# Altium PCB PCB-00001-A-01.PcbDoc (part 1 of 3)
Units mm, origin at the board's own origin, x right, y up, seen from the top; angles counter-clockwise.
Board outline 139.7 x 78.23 mm, 4 copper layers (Top Layer, GND, PWR, Bottom Layer), stack 1.58 mm thick; 84 components, 52 nets, 278 pads, 148 vias.
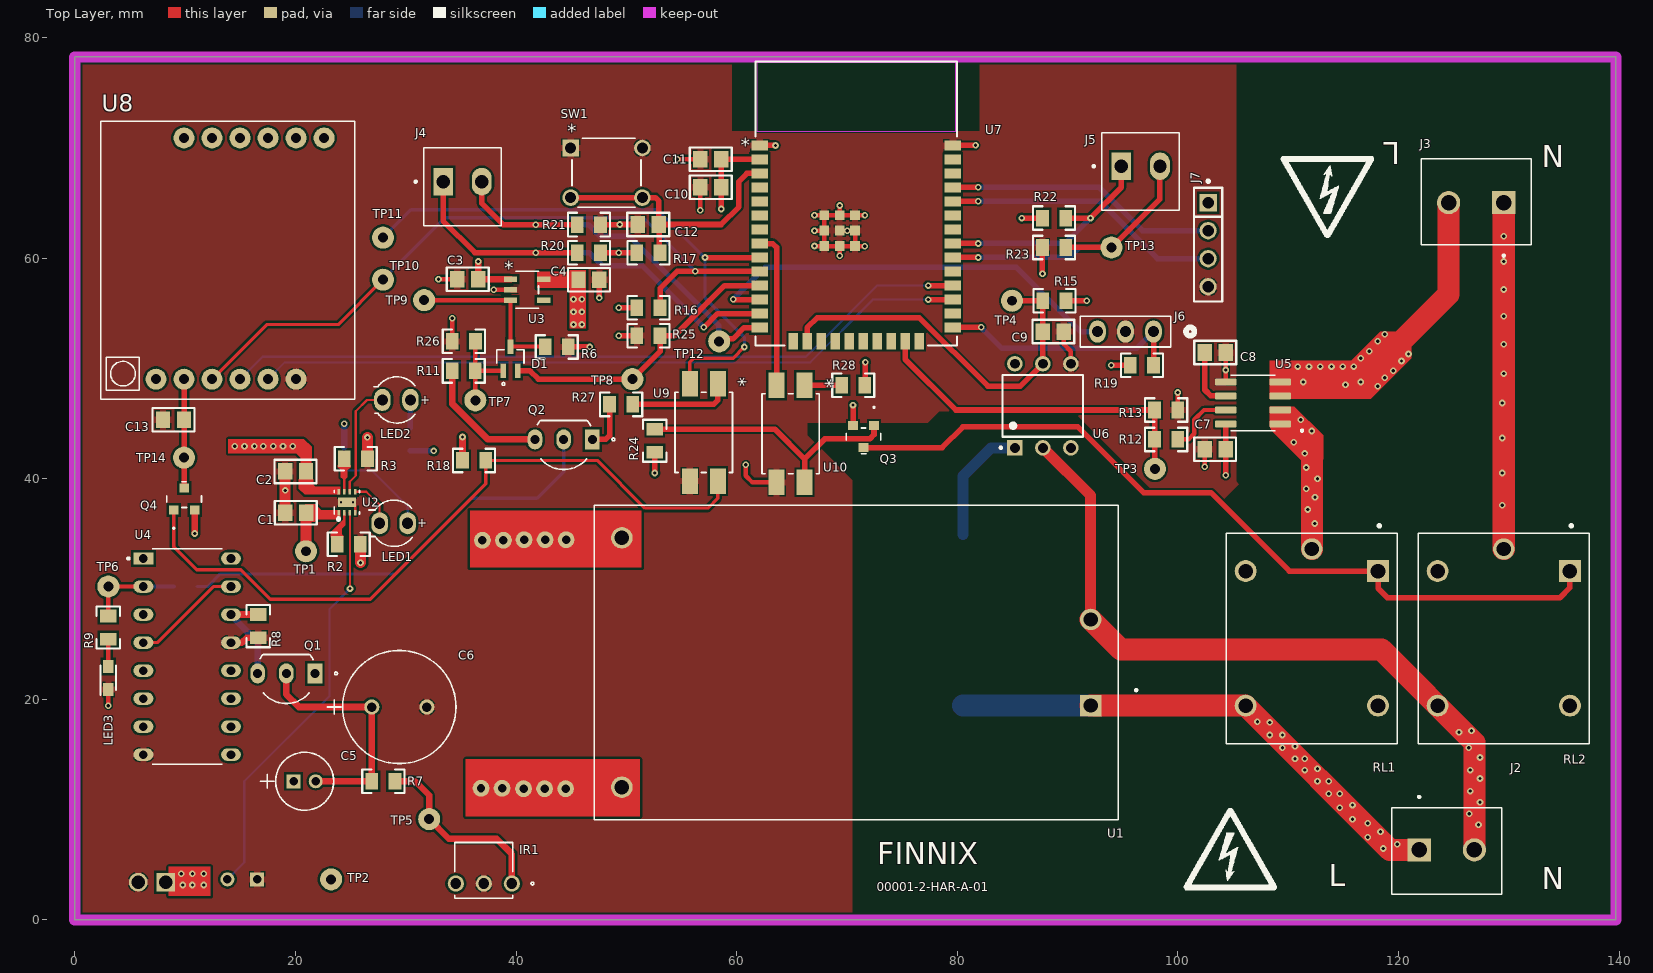
[diagram p0: Top Layer view]
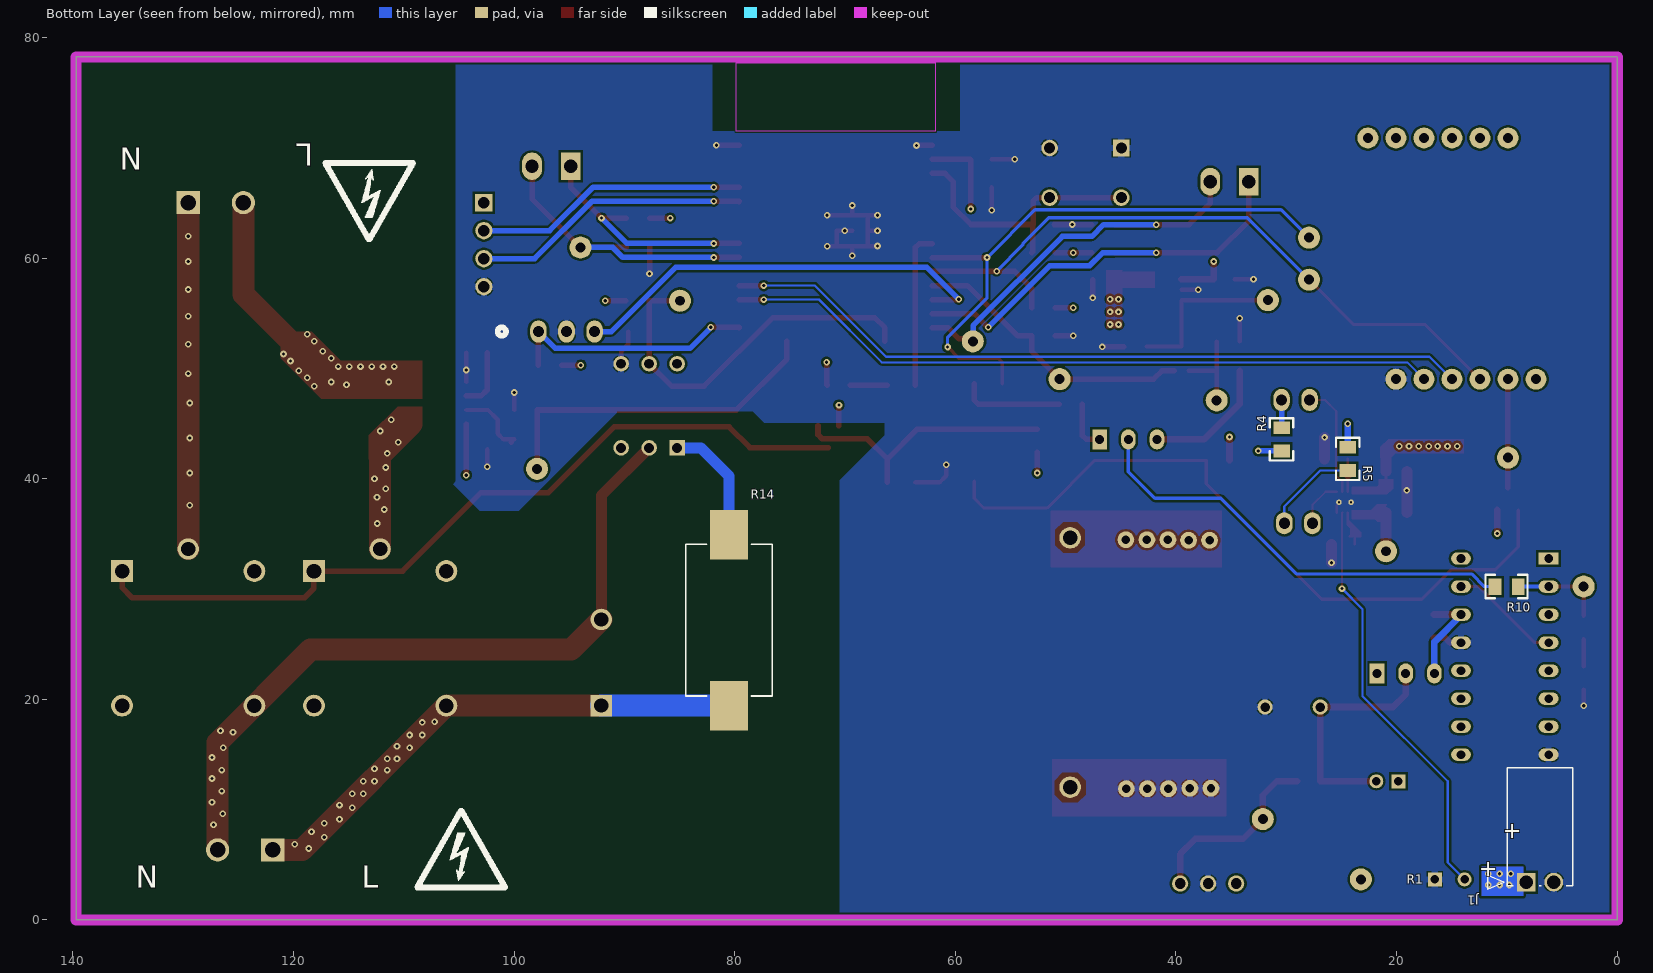
[diagram p1: Bottom Layer view, seen from below]
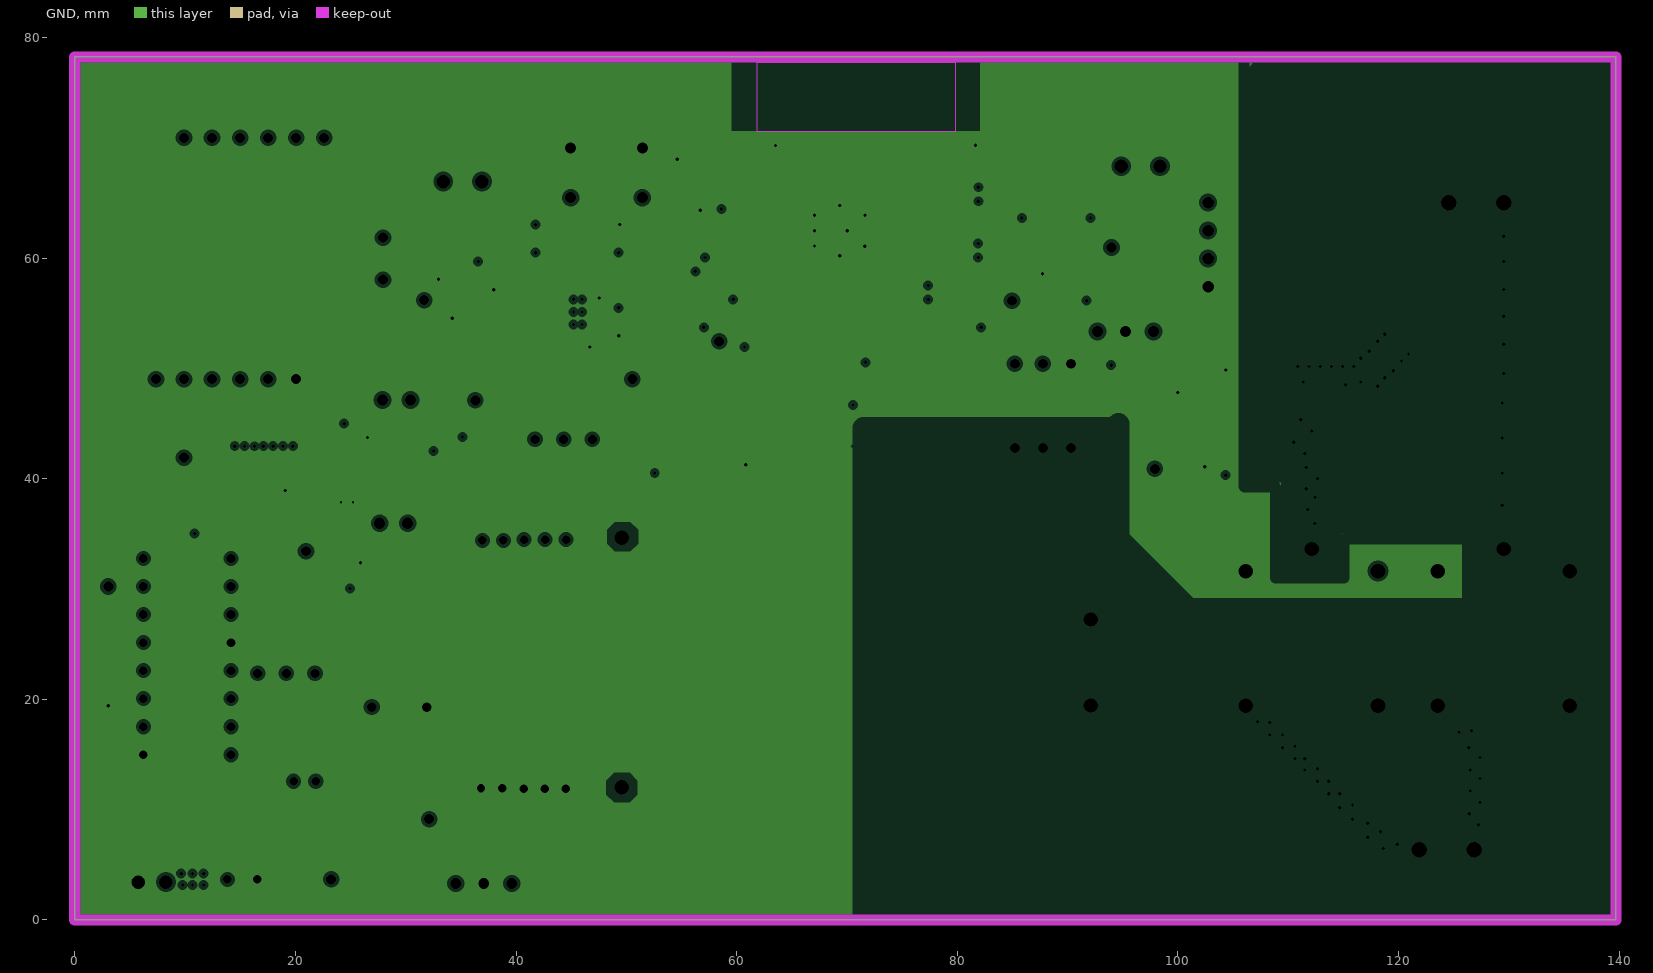
[diagram p2: GND, clearances drawn from the general rule]
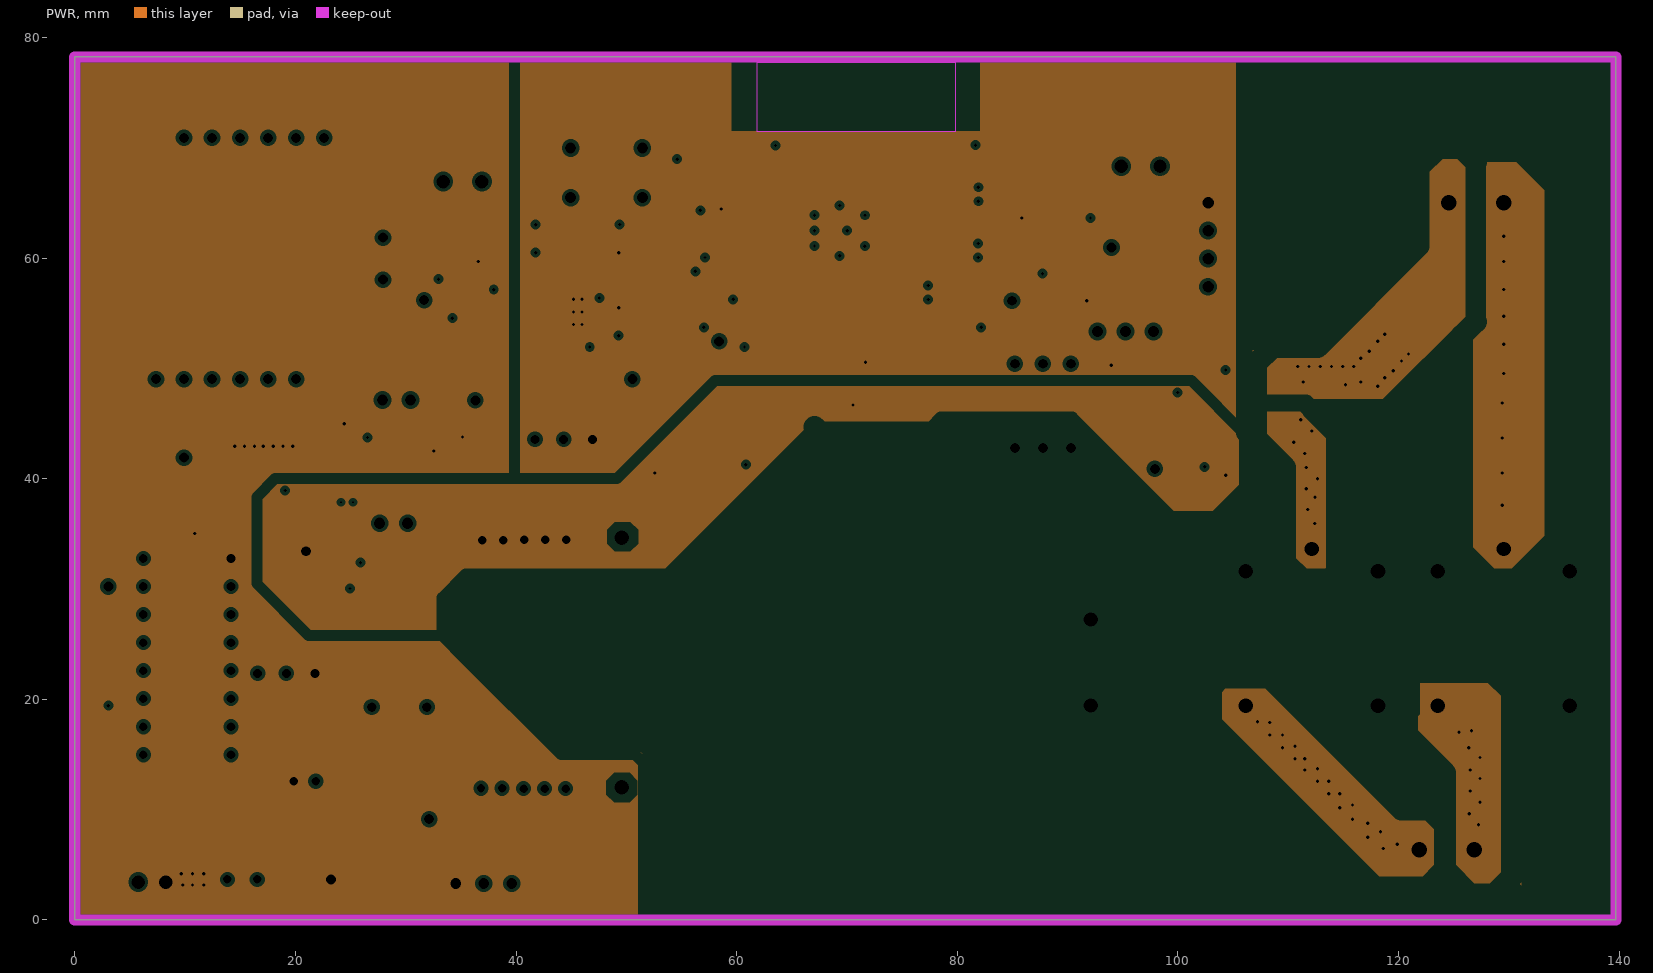
[diagram p3: PWR, clearances drawn from the general rule]
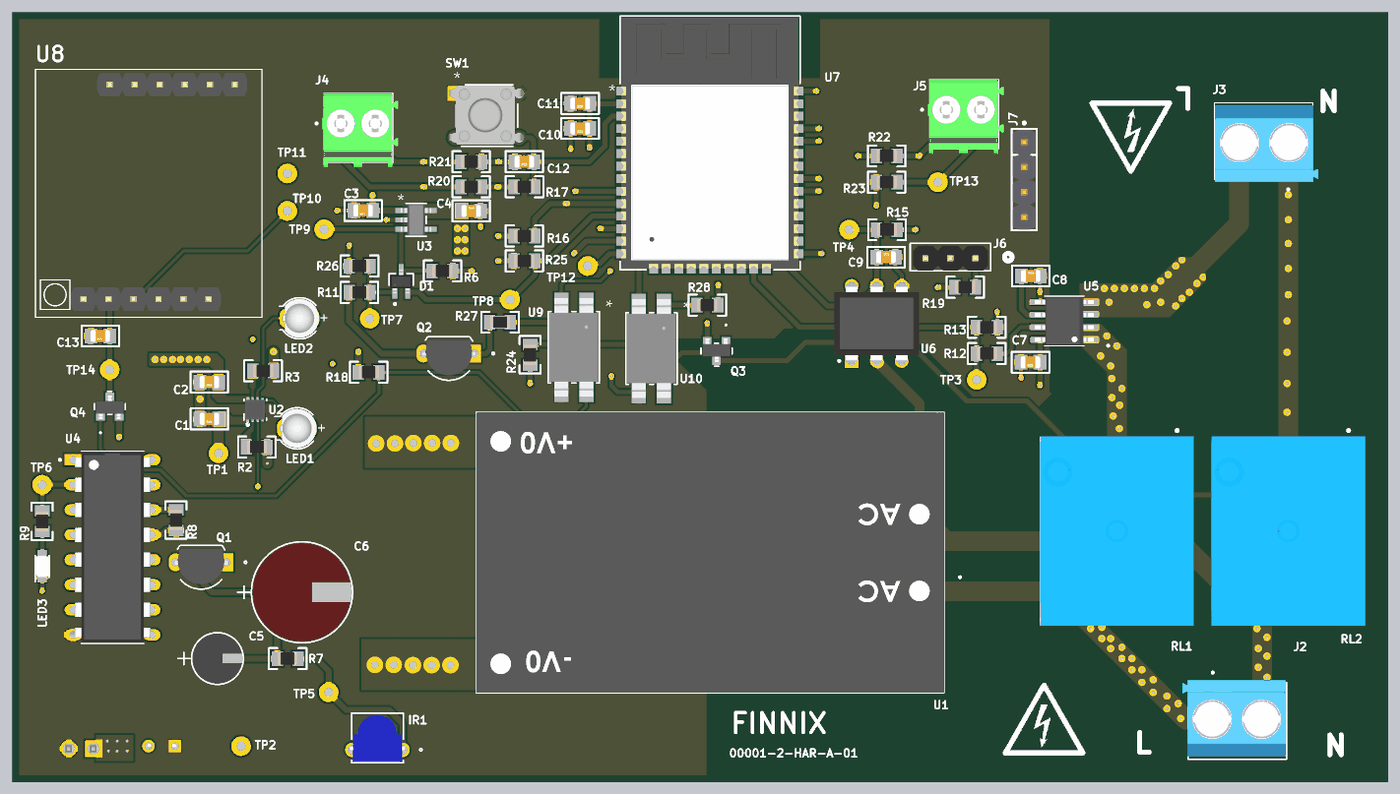
[diagram p5: 3D render of the assembled board from above, using the file's embedded part models]
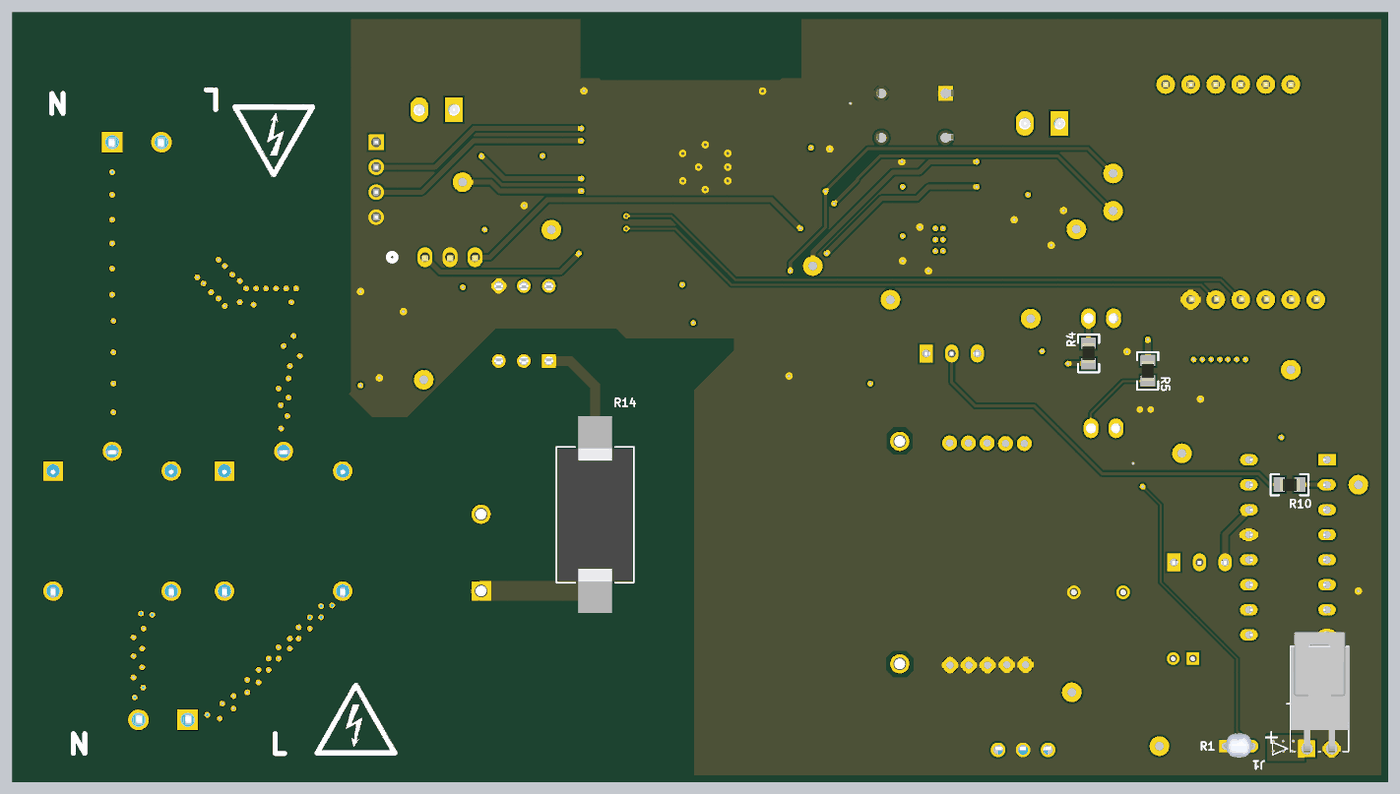
[diagram p6: 3D render of the assembled board from below, using the file's embedded part models]

## Layer stack, top to bottom
Top Solder: solder mask 0.01, Solder Resist, Dk 3.5
Top Layer: signal copper 0.035
Dielectric 2: prepreg 0.15, PP-006, Dk 4.1
GND: plane copper 0.035, net DGND
Dielectric 1: dielectric 1.14, FR-4, Dk 4.8
PWR: plane copper 0.035, net (Multiple Nets)
Dielectric 3: prepreg 0.15, PP-006, Dk 4.1
Bottom Layer: signal copper 0.035
Bottom Solder: solder mask 0.01, Solder Resist, Dk 3.5

## Board outline
0,0 0,78.232 139.7,78.232 139.7,0

## Design rules (kind name [scope] priority, off if disabled: settings)
BoardOutlineClearance [All] p1: gap=0.2 ignorepadtopadclearanceinfootprint=FALSE
Clearance [All] p1: gap=0.2 ignorepadtopadclearanceinfootprint=FALSE except(0.102: SMDPad-SMDPad SMDPad-THPad SMDPad-Text THPad-THPad THPad-Text Fill-Text Poly-Text Region-Text Text-Text; 0.127: SMDPad-Via THPad-Via Via-Via Via-Text; 0.15: Arc-Arc Arc-Track Arc-SMDPad Arc-THPad Arc-Via Arc-Text Track-Track Track-SMDPad Track-THPad Track-Via Track-Text; 0.25: Arc-Hole Track-Hole SMDPad-Hole THPad-Hole Via-Hole Fill-Hole Poly-Hole Region-Hole Text-Hole)
ComponentClearance [All] p1: gap=0.102 collisioncheckmode=3 verticalgap=0.102 showdistances=TRUE
DiffPairsRouting [All] p1: maxlimit=0.102 minlimit=0.102 mostfreqgap=0.102 toplayer_minwidth=0.102 toplayer_maxwidth=1816.048 toplayer_prefwidth=0.102 bottomlayer_minwidth=0.102 bottomlayer_maxwidth=1816.048 bottomlayer_prefwidth=0.102 maxuncoupledlength=12.7
Height [All] p1: minheight=0 maxheight=1816.048 prefheight=12.7
HoleSize [All] p1: absolutevalues=TRUE maxlimit=6.3 minlimit=0.2 maxpercent=80.000 minpercent=20.000
HoleToHoleClearance [All] p1: gap=0.25 allowstackedmicrovias=FALSE
MinimumAnnularRing [All] p1: minimumring=0.076
MinimumSolderMaskSliver [All] p1: minsoldermaskwidth=0
PlaneClearance [All] p1: clearance=0.302
PlaneConnect PlaneConnectPowerPads [InPadClass('PowerPads')] p1: planeconnectstyle=Direct reliefexpansion=0.508 reliefentries=4 reliefconductorwidth=0.254 reliefairgap=0.254
PlaneConnect [All] p2: pad.planeconnectstyle=Relief pad.reliefexpansion=0.3 pad.reliefentries=4 pad.reliefconductorwidth=0.602 pad.reliefairgap=0.102 via.planeconnectstyle=Direct via.reliefexpansion=0.3 via.reliefentries=4 via.reliefconductorwidth=0.127 via.reliefairgap=0.127
PolygonConnect PolygonConnectPowerPads [All vs (InPadClass('PowerPads'))] p1: connectstyle=Direct reliefconductorwidth=0.254 reliefentries=4 polygonreliefangle="90 Angle" airgapwidth=0.254
PolygonConnect [All] p2: thpad.connectstyle=Relief thpad.reliefconductorwidth=0.602 thpad.reliefentries=4 thpad.polygonreliefangle="90 Angle" thpad.airgapwidth=0.102 smdpad.connectstyle=Relief smdpad.reliefconductorwidth=0.602 smdpad.reliefentries=4 smdpad.polygonreliefangle="90 Angle" smdpad.airgapwidth=0.102 via.connectstyle=Direct via.reliefconductorwidth=0.127 via.reliefentries=4 via.polygonreliefangle="90 Angle" via.airgapwidth=0.127
RoutingVias [All] p1: holewidth=0.2 width=0.45 viastyle="Through Hole" minholewidth=0.2 minwidth=0.45 maxholewidth=6.3 maxwidth=6.55
SilkToSilkClearance [All] p1: silktosilkclearance=0
SilkToSolderMaskClearance [IsPad] p1: minsilkscreentomaskgap=0.05 clearancetoexposedcopper=TRUE
SolderMaskExpansion [All] p1: expansion=0.075 istentingtop=FALSE
SupplyNets "Schematic Supply Nets" [InNet('DGND')] p1: voltage=0.000
Width [All] p1: maxlimit=1816.048 minlimit=0.102 preferedwidth=0.102
20 further rules are at their usual default settings.

## Classes and differential pairs
component class U_SCH-00001-AC-01: C10 C11 C12 C13 J6 J7 Q4 R16 R17 R18 R19 R20 R21 R22 R23 R27 SW1 TP10 TP11 TP12 TP13 TP14 U7 U8 U9
component class U_SCH-00001-AB-01: C1 C2 C3 C4 C5 C6 C7 C8 C9 D1 IR1 J1 J2 J3 J4 J5 LED1 LED2 LED3 Q1 Q2 Q3 R1 R2 R3 R4 R5 R6 R7 R8 R9 R10 R11 R12 R13 R14 R15 R24 R25 R26 R28 RL1 RL2 TP1 TP2 TP3 TP4 TP5 TP6 TP7 TP8 TP9 U1 U2 U3 U4 U5 U6 U10

## Components (designator, comment, footprint, x,y, rotation, side; value= is the part's Value field where it differs from the comment)
C1 "GRM21BR71A105KA01L" CAP0805 20.029,36.916 r180 top value="1uF 10V"
C2 "GRM21BR71A105KA01L" CAP0805 20.019,40.66 r180 top value="1uF 10V"
C3 "GRM21BR71A105KA01L" CAP0805 35.626,58.083 r180 top value="1uF 10V"
C4 "GRM21BR71A105KA01L" CAP0805 46.609,58.039 r0 top value="1uF 10V"
C5 "ECA-0JM101" EC-A_PAN 19.837,12.573 r0 top value="100uF 6.3V"
C6 "UPX1V2R2MPD" CAP_RN_10X12P5_NCH 26.924,19.304 r0 top value="2.2uF 35V"
C7 "08056D104KAT2A" CAP0805 103.378,42.672 r180 top value="0.1 µF 6.3 V"
C8 "C0805C102K8RAC7800" CAP0805 103.382,51.439 r0 top value="1nF 10 V"
C9 "CL21A226KQCLRNC" CAP0805 88.707,53.34 r0 top value="22 µF 6.3 V"
C10 "CL21A226KQCLRNC" CAP0805 57.658,66.421 r180 top value="22 µF 6.3 V"
C11 "08056D104KAT2A" CAP0805 57.658,68.961 r180 top value="0.1 µF 6.3 V"
C12 "08056D104KAT2A" CAP0805 51.992,63.043 r180 top value="0.1 µF 6.3 V"
C13 "08056D104KAT2A" CAP0805 8.956,45.339 r180 top value="0.1 µF 6.3 V"
D1 "BAT30CWFILM" SOT-323_2P2X1P35X1P3_STM-M 39.499,50.876 r0 top value="SCHOT 30V 300MA"
IR1 "TSOP38238" TSOP382 39.624,3.302 r180 top value="SENSOR REMOTE REC 38.0KHZ 20M"
J1 "1053131102" CON_1053131102 8.255,3.429 r0 bottom
J2 "TB003-500-P02BE" CUI_TB003-500-P02BE 121.873,6.35 r0 top value="TERMINAL BLOCK, SCREW TYPE, 5.00"
J3 "TB003-500-P02BE" CUI_TB003-500-P02BE 129.54,65.024 r180 top value="TERMINAL BLOCK, SCREW TYPE, 5.00"
J4 "1984617" PHOENIX_1984617 31.651,62.929 r0 top value="TERM BLK 2POS SIDE ENT 3.5MM PCB"
J5 "1984617" PHOENIX_1984617 93.119,64.326 r0 top value="TERM BLK 2POS SIDE ENT 3.5MM PCB"
J6 "PRPC003SAAN-RC" CONN_PRPC003SAAN-RC_SUL 97.79,53.34 r180 top
J7 "68000-204HLF" Amphenol_FCI_0_MFG 102.743,61.214 r270 top value="CONN HEADER VERT 4POS 2.54MM"
LED1 "151031VS06000" WL-TMRC_D3.95H5.3_GREEN 28.909,35.961 r180 top value="2.2 V 20mA"
LED2 "151034BS03000" WL-TMRC_D3.95H5.3_BLUE 29.163,47.137 r180 top value="2.2 V 20mA"
LED3 "LS M676-Q2S1-1-Z" LEDM2214X140N 3.048,21.937 r90 top value="2.3 V 30mA"
Q1 "BC557ATA" TO-92-3L_5P33X5P2_ONS 21.777,22.352 r180 top value="BJT PNP 45V 0.1A"
Q2 "BC548" TO-92-3L_5P33X5P2_ONS 46.923,43.561 r180 top value="TRANS NPN 30V 0.1A"
Q3 "DMG2301U-7" SOT23_DMG2301U_DIO 71.501,43.815 r270 top value="P-Channel 20 V 2.5A"
Q4 "DMG2301U-7" SOT23_DMG2301U_DIO 9.922,38.161 r90 top value="P-Channel 20 V 2.5A"
R1 "DC103G9G" DC_USS 16.543,3.683 r180 bottom value=10K
R2 "ERA-6AEB3830V" RES0805 24.845,34.056 r180 top value=383
R3 "ERJ-6GEYJ273V" RES0805 25.48,41.803 r180 top value=27K
R4 "ERJ-6GEYJ101V" RES0805 30.433,43.567 r270 bottom value=100
R5 "ERJ-6GEYJ101V" RES0805 24.426,41.799 r90 bottom value=100
R6 "ERJ-6GEYJ102V" RES0805 43.688,51.943 r0 top value=1K
R7 "ERA-6AEB561V" RES0805 27.974,12.573 r0 top value=560
R8 "ERA-6AEB331V" RES0805 16.637,26.636 r90 top value=330
R9 "ERA-6AEB101V" RES0805 3.048,26.509 r90 top value=100
R10 "ERA-6AEB511V" RES0805 10.033,30.226 r180 bottom value=510
R11 "ERA-6AEB561V" RES0805 35.26,49.771 r180 top value=560
R12 "ERA-6AEB103V" RES0805 98.933,43.561 r180 top value=10K
R13 "ERA-6AEB103V" RES0805 98.933,46.228 r180 top value=10K
R14 "SMF533KJT" RES_SMF5_TYCO_TYC 80.518,27.178 r90 bottom value=33K
R15 "ERJ-6GEYJ273V" RES0805 88.807,56.134 r0 top value=27K
R16 "ERA-6AEB103V" RES0805 52.004,55.495 r180 top value=10K
R17 "ERA-6AEB103V" RES0805 52.008,60.494 r180 top value=10K
R18 "ERA-6AEB103V" RES0805 36.195,41.656 r180 top value=10K
R19 "ERA-6AEB103V" RES0805 96.74,50.292 r180 top value=10K
R20 "ERA-6AEB103V" RES0805 46.606,60.494 r0 top value=10K
R21 "ERA-6AEB103V" RES0805 46.606,63.034 r180 top value=10K
R22 "ERA-6AEB103V" RES0805 88.773,63.627 r180 top value=10K
R23 "ERA-6AEB103V" RES0805 88.773,60.96 r0 top value=10K
R24 "ERA-6AEB103V" RES0805 52.578,43.434 r270 top value=10K
R25 "ERA-6AEB103V" RES0805 52.006,52.968 r0 top value=10K
R26 "ERA-6AEB103V" RES0805 35.272,52.451 r0 top value=10K
R27 "ERJ-6GEYJ101V" RES0805 49.53,46.736 r180 top value=100
R28 "ERJ-6GEYJ101V" RES0805 70.574,48.476 r0 top value=100
RL1 "SRD-05VDC-SL-C" RELAY_SRD-05VDC-SL-C 112.141,25.527 r270 top
RL2 "SRD-05VDC-SL-C" RELAY_SRD-05VDC-SL-C 129.54,25.527 r270 top
SW1 "1-1825910-8" SW4_1825910-E_TEC 51.458,65.477 r0 top
TP1 "TEST point" TEST_POINT 20.961,33.421 r0 top
TP2 "TEST point" TEST_POINT 23.241,3.683 r90 top
TP3 "TEST point" TEST_POINT 97.917,40.894 r90 top
TP4 "TEST point" TEST_POINT 84.963,56.134 r90 top
TP5 "TEST point" TEST_POINT 32.131,9.144 r90 top
TP6 "TEST point" TEST_POINT 3.048,30.226 r180 top
TP7 "TEST point" TEST_POINT 36.31,47.103 r90 top
TP8 "TEST point" TEST_POINT 50.546,49.022 r90 top
TP9 "TEST point" TEST_POINT 31.672,56.183 r90 top
TP10 "TEST point" TEST_POINT 27.94,58.039 r90 top
TP11 "TEST point" TEST_POINT 27.94,61.849 r90 top
TP12 "TEST point" TEST_POINT 58.42,52.451 r90 top
TP13 "TEST point" TEST_POINT 93.98,60.96 r90 top
TP14 "TEST point" TEST_POINT 9.906,41.91 r90 top
U1 "HLK-10M05" CONV_HLK-10M05 70.848,23.339 r180 top
U2 "BQ25170DSGR" DSG0008A 24.676,37.866 r90 top
U3 "RP170N331D-TR-FE" SOT-23-5SC-74A_PE-SOT-23-5-180326_NMD-M 41.004,57.133 r0 top
U4 "CD4017BE" DIP794W45P254L1969H508Q16 10.193,23.876 r0 top value="IC DECADE COUNTER 10BIT 16DIP"
U5 "ACS712ELCTR-20A-T" SOIC127P600X175-8N 106.807,46.863 r180 top value="SENSOR CURRENT HALL 20A AC/DC"
U6 "H11AA1" DIP762W50P254L730H410Q6 87.757,46.609 r90 top value="6PIN AC INPUT, SINGLE OPTOCOUPLE"
U7 "ESP32-WROOM-32E-N4" ESP32­WROOM­32E_EXP 70.841,64.948 r0 top value="RF TXRX MOD BT BLE WIFI"
U8 "SIM800L" SIM800L-CORE 7.366,49.022 r90 top
U9 "PC81710NIP1B" SOP_PC8171_SCT-M 57.023,44.196 r270 top
U10 "PC81710NIP1B" SOP_PC8171_SCT-M 64.897,44.069 r270 top

## Footprints (in the part's own frame and the unit in brackets; to place one, negate y for a bottom-side part, rotate by r counter-clockwise, add the part's x,y. Pads: shape width x height; smd on the part's side, far side on the other; paste and mask are expansions set on the pad)
Amphenol_FCI_0_MFG [mm]
  rect 1.57x1.57 hole 1.02 paste-2539.97 mask+0: 1(-3.81,0)
  round 1.57 hole 1.02 paste-2539.97 mask+0: 2(-1.27,0) 3(1.27,0) 4(3.81,0)
  silkscreen extent -5.88,-1.28 5.16,1.29, body extent -5.26,-1.38 5.26,1.38, height 0.25
CAP0805 [mm]
  rect 1.3x1.5 smd: 1(-0.95,0) 2(0.95,0)
  silkscreen extent -1.9,-1.06 1.9,1.07, body extent -1,-0.62 1,0.63, height 0.78
CAP_RN_10X12P5_NCH [mil]
  round 54 / inner round 60 / far side round 54 hole 34 paste-99999 mask+0: 1(0,0) 2(196.85,0)
  silkscreen extent -159,-202 300,202, body extent -99,-197 296,197, height 552
CON_1053131102 [mm]
  rect 1.7x1.7 / inner round 1.524 / far side rect 1.7x1.7 hole 1.2 paste-2539.97 mask+0.076: 1(0,0)
  round 1.7 / inner round 1.524 / far side round 1.7 hole 1.2 paste-2539.97 mask+0.076: 2(-2.5,0)
  silkscreen extent -4.22,-10.38 3.5,0.64, body extent -4.24,-11.81 1.7,0.35, height 7.2
CONN_PRPC003SAAN-RC_SUL [mm]
  oval 1.5x2 / inner oval 1.524x2 / far side oval 1.499x2 hole 0.991 paste-2539.97 mask+0: 1(0,0) 2(2.54,0) 3(5.08,0)
  silkscreen extent -3.71,-1.4 6.63,1.4, body extent -1.27,-1.17 6.35,1.37, height 7.62
CONV_HLK-10M05 [mm]
  rect 1.95x1.95 / inner round 1.95 / far side rect 1.95x1.95 hole 1.3: 1(-21.25,3.9)
  round 1.95 hole 1.3: 2(-21.25,-3.9) 3(21.25,11.3) 4(21.25,-11.3)
  silkscreen extent -25.47,-14.25 23.75,14.25, body extent -23.75,-14.25 23.75,14.25, height 22
CUI_TB003-500-P02BE [mm]
  rect 2.1x2.1 / inner round 2.1 / far side rect 2.1x2.1 hole 1.4: 1(0,0)
  round 2.1 hole 1.4: 2(5,0)
  silkscreen extent -2.5,-4 7.5,4.9, body extent -3.06,-3.74 7.44,4.06, height 10.3
DC_USS [mil]
  rect 50x50 / inner round 60 / far side rect 50x50 hole 30 paste-99999 mask+0: 1(0,0)
  round 50 / inner round 60 / far side round 50 hole 30 paste-99999 mask+0: 2(106.3,0)
  body extent -4,-47 112,52, height 760
DIP762W50P254L730H410Q6 [mm]
  rect 1.4x1.4 / inner round 1.4 / far side rect 1.4x1.4 hole 0.9: 1(-3.81,2.54)
  round 1.4 hole 0.9: 2(-3.81,0) 3(-3.81,-2.54) 4(3.81,-2.54) 5(3.81,0) 6(3.81,2.54)
  silkscreen extent -3.9,-3.65 2.8,3.9, body extent -4.11,-4.3 4.11,4.3, height 4.61
DIP794W45P254L1969H508Q16 [mm]
  rect 1.8x1.13 / inner oval 1.8x1.13 / far side rect 1.8x1.13 hole 0.78: 1(-3.97,8.89)
  oval 1.8x1.13 hole 0.78: 2(-3.97,6.35) 3(-3.97,3.81) 4(-3.97,1.27) 5(-3.97,-1.27) 6(-3.97,-3.81) 7(-3.97,-6.35) 8(-3.97,-8.89) 9(3.97,-8.89) 10(3.97,-6.35) 11(3.97,-3.81) 12(3.97,-1.27) 13(3.97,1.27) 14(3.97,3.81) 15(3.97,6.35) 16(3.97,8.89)
  silkscreen extent -5.43,-9.77 3.17,9.77, body extent -3.85,-9.65 3.85,9.65, height 5.08
DSG0008A [mm]
  rect 0.5x0.25 smd paste+0 mask+0.051: 1(-0.95,0.75) 2(-0.95,0.25) 3(-0.95,-0.25) 4(-0.95,-0.75) 5(0.95,-0.75) 6(0.95,-0.25) 7(0.95,0.25) 8(0.95,0.75)
  round 0.5 / inner round 1.524 / far side round 0.5 hole 0.203 paste-2539.97 mask+0.076: 9(0,0.55) 9(0,-0.55)
  rect 0.9x1.6 smd paste-0.45 mask+0.051: 9(0,0)
  silkscreen extent -1.72,-1.15 1.07,1.15, body extent -1,-1 1,1, height 0.77
EC-A_PAN [mil]
  rect 50x50 / inner round 60 / far side rect 50x50 hole 30 paste-99999 mask+0: 1(0,0)
  round 50 / inner round 60 / far side round 50 hole 30 paste-99999 mask+0: 2(79,0)
  silkscreen extent -119,-103 143,103, body extent -59,-98 139,98, height 424
ESP32­WROOM­32E_EXP [mil]
  rect 59x35 smd paste+0 mask+0: 1(-344.5,207.1) 2(-344.5,157.1) 3(-344.5,107.1) 4(-344.5,57.1) 5(-344.5,7.1) 6(-344.5,-42.9) 7(-344.5,-92.9) 8(-344.5,-142.9) 9(-344.5,-192.9) 10(-344.5,-242.9) 11(-344.5,-292.9) 12(-344.5,-342.9) 13(-344.5,-392.9) 14(-344.5,-442.9) 25(344.5,-442.9) 26(344.5,-392.9) 27(344.5,-342.9) 28(344.5,-292.9) 29(344.5,-242.9) 30(344.5,-192.9) 31(344.5,-142.9) 32(344.5,-92.9) 33(344.5,-42.9) 34(344.5,7.1) 35(344.5,57.1) 36(344.5,107.1) 37(344.5,157.1) 38(344.5,207.1)
  rect 35x59 smd paste+0 mask+0: 15(-225,-492.15) 16(-175,-492.15) 17(-125,-492.15) 18(-75,-492.15) 19(-25,-492.15) 20(25,-492.15) 21(75,-492.15) 22(125,-492.15) 23(175,-492.15) 24(225,-492.15)
  rect 35x35 smd paste+0 mask+0: 39(-59.1,-96.9) 40(-114.2,-41.8) 41(-114.2,-96.9) 42(-114.2,-152) 43(-59.1,-152) 44(-4,-152) 45(-4,-96.9) 46(-4,-41.8) 47(-59.1,-41.8)
  Keep-Out Layer region: 354.5,258 354.5,502 -354.5,502 -354.5,258
  silkscreen extent -360,-507 360,507, body extent -354,-502 354,502, height 128
LEDM2214X140N [mm]
  rect 1.2x0.95 smd: 1(-1.05,0) 2(1.05,0)
  silkscreen extent -1.53,-0.7 1.1,0.7, body extent -1.15,-0.7 1.15,0.7, height 1.2
PHOENIX_1984617 [mm]
  rect 1.8x2.5 / inner oval 1.8x2.5 / far side rect 1.8x2.5 hole 1.2: 1(1.75,4)
  oval 1.8x2.5 hole 1.2: 2(5.25,4)
  silkscreen extent -0.85,0 7,7.05, body extent -0.17,-0.51 7.53,7.04, height 9.15
RELAY_SRD-05VDC-SL-C [mm]
  rect 1.98x1.98 / inner round 1.98 / far side rect 1.98x1.98 hole 1.32: A1(-6.1,6)
  round 1.98 hole 1.32: A2(-6.1,-6) NC(6.1,6) NO(6.1,-6)
  round 1.935 hole 1.29: COM(-8.1,0)
  silkscreen extent -10.3,-7.75 9.55,7.75, body extent -9.6,-7.8 9.6,7.8, height 15.8
RES0805 [mm]
  rect 1.15x1.5 smd: 1(-1.05,0) 2(1.05,0)
  silkscreen extent -1.91,-1.07 1.9,1.07, body extent -1,-0.63 1,0.63, height 0.43
RES_SMF5_TYCO_TYC [mil]
  rect 177x134 smd paste+0 mask+0: 1(-305,0) 2(305,0)
  silkscreen extent -271,-155 271,155, body extent -266,-149 266,149, height 268
SIM800L-CORE [mm]
  round 1.9 hole 0.9: 1(0,0) 2(0,-2.54) 3(0,-5.08) 4(0,-7.62) 5(0,-10.16) 6(0,-12.7) 7(21.87,-15.24) 8(21.87,-12.7) 9(21.87,-10.16) 10(21.87,-7.62) 11(21.87,-5.08) 12(21.87,-2.54)
  silkscreen extent -1.8,-18 23.4,5, body extent -1.83,-17.85 23.19,5.15, height 5.78
SOIC127P600X175-8N [mm]
  rrect25% 1.97x0.6 smd: 1(-2.475,1.905) 2(-2.475,0.635) 3(-2.475,-0.635) 4(-2.475,-1.905) 5(2.475,-1.905) 6(2.475,-0.635) 7(2.475,0.635) 8(2.475,1.905)
  silkscreen extent -4.54,-2.52 2,2.6, body extent -3,-2.45 3,2.45, height 1.75
SOP_PC8171_SCT-M [mil]
  rect 91x57 smd paste+0 mask+0: 1(-173.5,50) 2(-173.5,-50) 3(173.5,-50) 4(173.5,50)
  silkscreen extent -143,-103 143,103, body extent -197,-97 197,97, height 157
SOT23_DMG2301U_DIO [mil]
  rect 32x35 smd paste+0 mask+0: 1(-39.37,37.4) 2(-39.37,-37.4) 3(39.37,0)
  silkscreen extent -107,-62 61,62, body extent -50,-57 44,57, height 43
SOT-23-5SC-74A_PE-SOT-23-5-180326_NMD-M [mil]
  rect 47.5x20 smd paste+0 mask+0: 1(-59.25,37.4) 2(-59.25,0) 3(-59.25,-37.4) 4(59.25,-37.4) 5(59.25,37.4)
  silkscreen extent -40,-66 40,66, body extent -61,-61 61,61, height 51
SOT-323_2P2X1P35X1P3_STM-M [mil]
  rect 20x52 smd paste+0 mask+0: 1(-25.59,-43.5) 2(25.59,-43.5) 3(0,43.5)
  silkscreen extent -48,-95 48,32, body extent -44,-48 44,48, height 43
SW4_1825910-E_TEC [mil]
  rect 59x59 / inner round 60 / far side rect 59x59 hole 39 paste-99999 mask+0: 1(-255.91,177.17)
  round 59 / inner round 60 / far side round 59 hole 39 paste-99999 mask-29.5: 2(0,177.17) 3(-255.91,0) 4(0,0)
  silkscreen extent -251,-34 -5,212, body extent -289,-28 19,208, height 111
TEST_POINT [mm]
  round 2 hole 0.9: ""(0,0)
TO-92-3L_5P33X5P2_ONS [mil]
  rect 52x70.87 / inner oval 60x70.87 / far side rect 52x70.87 hole 32 paste-99999 mask+0: 1(0,0)
  oval 52x70.87 / inner oval 60x70.87 / far side oval 52x70.87 hole 32 paste-99999 mask+0: 2(102.36,0) 3(204.72,0)
  silkscreen extent -80,-68 196,107, body extent -9,-55 213,88, height 385
TSOP382 [mil]
  round 58 / inner round 60 / far side round 58 hole 38 paste-99999 mask+0: 1(0,0) 2(100,0) 3(200,0)
  silkscreen extent -78,-147 204,52, body extent -13,-139 214,49, height 787
WL-TMRC_D3.95H5.3_BLUE [mm] "THT Mono-color Round Color LED, 2-leads"
  oval 1.5x2 hole 1 mask+0.08: 1(-1.27,0) 2(1.27,0)
  silkscreen extent -1.68,-2.1 2.06,2.1, body extent -1.99,-1.96 1.63,1.96, height 5.35
WL-TMRC_D3.95H5.3_GREEN [mm] "THT Mono-color Round Color LED, 2-leads"
  oval 1.5x2 hole 1: 1(-1.27,0) 2(1.27,0)
  silkscreen extent -1.68,-2.1 2.24,2.1, body extent -1.99,-1.96 1.63,1.96, height 5.35

## Part data
C1 C2 C3 C4: "1 µF ±10% 10V Ceramic Capacitor X7R 0805 (2012 Metric)", Distributor 1 part no.=490-1695-1-ND, Manufacturer="Murata Electronics", Package=0805, Supplier Part Number 1=5623319, ComponentLink1Description="Reference Product Link", ComponentLink1URL=https://www.digikey.in/en/products/detail/murata-electronics/GRM21BR71A105KA01L/586695, Date drawn=01/09/24, Distributor 1=digikey, Drawn by="Varun Chakravarthy", FIT/NFIT=FIT, Manufacturer part no.=GRM21BR71A105KA01L, Price=₹10.06, Price (Quantity)=₹3.30250(100+), Reference(datasheet)=https://search.murata.co.jp/Ceramy/image/img/A01X/G101/ENG/GRM21BR71A105KA01-01.pdf, Supplier 1="Future Electronics"
C5: "100 µF 6.3 V Aluminum Electrolytic Capacitors Radial, Can 2000 Hrs @ 85°C", Distributor 1 part no.=478-08056D104KAT2ACT-ND, Manufacturer="Panasonic Electronic Components", Supplier Part Number 1=667-ECA-0JM101, Value 2=TH, ComponentLink1Description="Reference Product link", ComponentLink1URL=https://www.digikey.in/en/products/detail/panasonic-electronic-components/ECA-0JM101/244970, Date drawn=12/09/2024, Distributor 1=Digikey, Drawn by="Varun Chakravarthy", FIT/NFIT=FIT, Manufacturer part no.=ECA-0JM101, Price=₹17.60, Price (Quantity)=₹5.75005(200+), Reference(datasheet)=https://mm.digikey.com/Volume0/opasdata/d220001/medias/docus/2452/ECA-xxM%20Series%2CTypeA.pdf, Supplier 1=Mouser, Supplier 2=Mouser, Supplier 3=Mouser, Supplier Part Number 2=667-ECA-0JM101I, Supplier Part Number 3=667-ECA-0JM101B
C6: "2.2 µF 35 V Aluminum Electrolytic Capacitors Radial, Can 20000 Hrs @ 105°C", Distributor 1 part no.=493-15889-ND, Manufacturer=Nichicon, Value 2=TH, ComponentLink1Description="Reference Product link", ComponentLink1URL=https://www.digikey.in/en/products/detail/nichicon/UPX1V2R2MPD/4994046, Date drawn=12/09/2024, Distributor 1=Digikey, Drawn by="Varun Chakravarthy", FIT/NFIT=FIT, Manufacturer part no.=UPX1V2R2MPD, Price=₹67.89, Price (Quantity)=₹27.71930(200+), Reference(datasheet)=https://media.digikey.com/pdf/Data%20Sheets/Nichicon%20PDFs/UPX.pdf, Supplier 1=Digikey, Supplier 2=Digikey, Supplier Part Number 1=493-15889-ND, Supplier Part Number 2=493-11908-1-ND
C7 C11 C12 C13: "0.1 µF ±10% 6.3V Ceramic Capacitor X5R 0805 (2012 Metric)", Distributor 1 part no.=478-08056D104KAT2ACT-ND, Manufacturer="KYOCERA AVX", Value 2=0805, ComponentLink1Description="Reference Product link", ComponentLink1URL=https://www.digikey.in/en/products/detail/kyocera-avx/08056D104KAT2A/11568656, Date drawn=04/07/24, Distributor 1=digikey, Drawn by="Varun Chakravarthy", FIT/NFIT=FIT, Manufacturer part no.=08056D104KAT2A, Price=₹8.38, Price (Quantity)=₹2.12900(100+), Reference(datasheet)=https://datasheets.kyocera-avx.com/cx5r.pdf, Supplier 1=Digikey, Supplier Part Number 1=478-08056D104KAT2ACT-ND
C8: "1000 pF ±10% 10V Ceramic Capacitor X7R 0805 (2012 Metric)", Distributor 1 part no.=399-C0805C102K8RAC7800CT-ND, Manufacturer=KEMET, Supplier Part Number 1=478-08056D104KAT2ACT-ND, Value 2=0805, ComponentLink1Description="Reference Product link", ComponentLink1URL=https://www.digikey.in/en/products/detail/kyocera-avx/08056D104KAT2A/11568656, Date drawn=16/09/24, Distributor 1=Digikey, Drawn by="Varun Chakravarthy", FIT/NFIT=FIT, Manufacturer part no.=C0805C102K8RAC7800, Price=₹10.06, Price (Quantity)=₹3.31930(100+), Reference(datasheet)=https://content.kemet.com/datasheets/KEM_C1002_X7R_SMD.pdf, Supplier 1=Digikey
C9 C10: "22 µF ±10% 6.3V Ceramic Capacitor X5R 0805 (2012 Metric)", Distributor 1 part no.=478-08056D104KAT2ACT-ND, Manufacturer="Samsung Electro-Mechanics", Value 2=0805, ComponentLink1Description="Reference Product link", ComponentLink1URL=https://www.digikey.in/en/products/detail/samsung-electro-mechanics/CL21A226KQCLRNC/5961171, Date drawn=03/9/2024, Distributor 1=digikey, Drawn by="Varun Chakravarthy", FIT/NFIT=FIT, Manufacturer part no.=CL21A226KQCLRNC, Price=₹9.22, Price (Quantity)=₹2.81640100+), Reference(datasheet)=https://weblib.samsungsem.com/mlcc/mlcc-ec-data-sheet.do?partNumber=CL05Y105KP6VPN, Supplier 1=Avnet, Supplier Part Number 1=CL21A226KQCLRNC
D1: "Remote Receiver Sensor 38.0kHz 20m Through Hole", Distributor 1 part no.=497-5550-1-ND, Manufacturer=STMicroelectronics, Supplier Part Number 1=3034833, Value 2=TH, ComponentLink1Description="Reference Product link", ComponentLink1URL=https://www.digikey.in/en/products/detail/stmicroelectronics/BAT30CWFILM/1207017, ComponentLink2Description="Reference Product link2", ComponentLink2URL=https://robocraze.com/products/tsop-1838b-small?_pos=1&_sid=ae64a7e59&_ss=r, Date drawn=12/07/24, Distributor 1=Digikey, Drawn by="Varun Chakravarthy", FIT/NFIT=FIT, Manufacturer part no.=BAT30CWFILM, Price=₹20.12, Price (Quantity)=₹6.62180(100+), Reference(datasheet)=https://www.st.com/content/ccc/resource/technical/document/datasheet/b5/44/50/dc/a4/84/48/70/CD00126118.pdf/files/CD00126118.pdf/jcr:content/translations/en.CD00126118.pdf, Supplier 1="Future Electronics"
IR1: "Remote Receiver Sensor 38.0kHz 20m Through Hole", Distributor 1 part no.=751-1227-ND, Distributor 2 part no.="TSOP 1838B small", Manufacturer="KYOCERA AVX", Supplier Part Number 1=478-08056D104KAT2ACT-ND, Value 2=TH, ComponentLink1Description="Reference Product link", ComponentLink1URL=https://www.digikey.in/en/products/detail/texas-instruments/CD4017BE/67253, ComponentLink2Description="Reference Product link2", ComponentLink2URL=https://robocraze.com/products/tsop-1838b-small?_pos=1&_sid=ae64a7e59&_ss=r, Date drawn=04/07/24, Distributor 1=digikey, Distributor 2=Robocraze, Drawn by="Varun Chakravarthy", FIT/NFIT=FIT, Manufacturer part no.=TSOP38238, Price=₹91.36, Price (Quantity)=₹50.28360(100+), Reference(datasheet)=https://www.vishay.com/docs/82491/tsop382.pdf, Supplier 1=Digikey
J1: "Connector Header Through Hole, Right Angle 2 position 0.049\" (1.25mm)", Distributor 1 part no.=WM16893-ND, Manufacturer=Molex, Supplier Part Number 1=538-105313-1102, ComponentLink1Description="Reference Product Link", ComponentLink1URL=https://www.digikey.in/en/products/detail/molex/1053131102/7693174, Date drawn=6/10/24, Distributor 1=Digikey, Drawn by=Varun, FIT/NFIT=FIT, Price=₹84.68, Price (Quantity)=₹58.42810(300+), Reference(datasheet)=https://tools.molex.com/pdm_docs/ps/PS-105300-100-001.pdf, Supplier 1=Mouser
J2 J3: "2 Position Wire to Board Terminal Block Horizontal with Board 0.197\" (5.00mm) Through Hole", Distributor 1 part no.=102-6161-ND, Manufacturer="Same Sky", Supplier Part Number 1=277-1721-ND, ComponentLink1Description="Reference Product Link", ComponentLink1URL=https://www.digikey.in/en/products/detail/same-sky-formerly-cui-devices/TB003-500-P02BE/10064085, Date drawn=26/09/24, Distributor 1=Digikey, Drawn by="Varun Chakravarthy", FIT/NFIT=FIT, Manufacturer part no.=TB003-500-P02BE, Price=₹29.34000, Price (Quantity)=₹29.34000(100+), Reference(datasheet)=https://www.sameskydevices.com/product/resource/tb003-500.pdf, Supplier 1=Digikey, Supplier 2=Digikey, Supplier 3=Digikey, Supplier Part Number 2=277-1721-ND, Supplier Part Number 3=277-1721-ND
J4 J5: "2 Position Wire to Board Terminal Block Horizontal with Board 0.138\" (3.50mm) Through Hole", Distributor 1 part no.=277-1721-ND, Manufacturer="Phoenix Contact", ComponentLink1Description="Reference Product Link", ComponentLink1URL=https://www.digikey.in/en/products/detail/isocom-components-2004-ltd/H11AA1/21185110, Date drawn=17/09/24, Distributor 1=Digikey, Drawn by="Varun Chakravarthy", FIT/NFIT=FIT, Manufacturer part no.=1984617, Price=₹36.88000, Price (Quantity)=₹36.88000(100+), Reference(datasheet)=https://mm.digikey.com/Volume0/opasdata/d220001/medias/docus/2450/Combicon%20Compact%20Series.pdf, Supplier 1=Digikey, Supplier 2=Digikey, Supplier 3=Digikey, Supplier Part Number 1=277-1721-ND, Supplier Part Number 2=277-1721-ND, Supplier Part Number 3=277-1721-ND
J6: "Connector Header Through Hole 3 position 0.100\" (2.54mm)", Distributor 1 part no.=S1011EC-03-ND, Manufacturer="Sullins Connector Solutions", Package=0805, ComponentLink1Description="Reference Product Link", ComponentLink1URL=https://www.digikey.in/en/products/detail/sullins-connector-solutions/PRPC003SAAN-RC/2775251?s=N4IgTCBcDaIAoCU4GEAMqDMBlAgjgcgLQLIgC6AvkA, Date drawn=12/9/2024, Distributor 1=Digikey, Dranw by=Varun, FIT/NFIT=FIT, Manufacturer part no.=PRPC003SAAN-RC, Price=₹36.88, Price (Quantity)="₹21.38250 (100+)", Reference(datasheet)=https://mm.digikey.com/Volume0/opasdata/d220001/medias/docus/386/xRxCzzzSxxN-RC_ST_11635-B.pdf, Supplier 1=Digikey, Supplier Part Number 1=S1011EC-03-ND
J7: "Connector Header Through Hole 4 position 0.100\" (2.54mm)", Distributor 1 part no.=609-3255-ND, Manufacturer="Amphenol ICC (FCI)", Supplier Part Number 1=28AH8822, ComponentLink1Description="Reference Product Link", ComponentLink1URL=https://www.digikey.in/en/products/detail/amphenol-cs-fci/68000-204HLF/1878484?s=N4IgTCBcDaIGwA4AMKC0YkBYASAZAYiALoC%2BQA, Date drawn=3/9/2024, Distributor 1=Digikey, Dranw by=Varun, FIT/NFIT=FIT, Manufacturer part no.=68000-204HLF, Price=₹36.88, Price (Quantity)="₹20.97180 (100+)", Reference(datasheet)=https://cdn.amphenol-cs.com/media/wysiwyg/files/documentation/datasheet/boardwiretoboard/bwb_bergstik.pdf, Supplier 1=Avnet, Supplier 2="Arrow Electronics", Supplier 3="Arrow Electronics", Supplier 4="Arrow Electronics", Supplier 5="Arrow Electronics", Supplier 6=Newark, Supplier 7=Avnet, Supplier Part Number 2=68016-204HLF, Supplier Part Number 3=68002-204HLF, Supplier Part Number 4=68000-204HLF, Supplier Part Number 5=68000-204HLF, Supplier Part Number 6=93K8020, Supplier Part Number 7=84K6839
LED1: "Green 568nm LED Indication - Discrete 2.2V Radial", Distributor 1 part no.=732-5008-ND, Manufacturer="Würth Elektronik", Package=TH, Value1=10%, ComponentLink1Description="Reference Product Link", ComponentLink1URL=https://www.digikey.in/en/products/detail/w%C3%BCrth-elektronik/151031VS06000/4489988, Date drawn=2/9/2024, Distributor 1=Digikey, Drawn by=Varun, FIT/NFIT=FIT, Manufacturer part no.=151031VS06000, Price=₹13.41, Price (Quantity)=₹11.14810(+100), Reference (datatsheet)=https://www.we-online.com/components/products/datasheet/151031VS06000.pdf, Supplier 1=Digikey, Supplier Part Number 1=732-5008-ND
LED2: "Blue 470nm LED Indication - Discrete 2.8V Radial", Distributor 1 part no.=732-5008-ND, Manufacturer="Würth Elektronik", Package=TH, Supplier Part Number 1=732-11401-ND, Value1=10%, ComponentLink1Description="Reference Product Link", ComponentLink1URL=https://www.digikey.in/en/products/detail/w%C3%BCrth-elektronik/151034BS03000/7315745, Date drawn=2/9/2024, Distributor 1=Digikey, Drawn by=Varun, FIT/NFIT=FIT, Manufacturer part no.=151034BS03000, Price=₹16.76, Price (Quantity)=₹10.14220(+100), Reference (datatsheet)=https://www.we-online.com/components/products/datasheet/151034BS03000.pdf, Supplier 1=Digikey
LED3: "Standard LEDs - SMD Super Red, 633nm 224mcd, 20mA", Distributor 1 part no.=720-LSM676-Q2S1-1-Z, Manufacturer="ams OSRAM", Package=0805, Value1=10%, Date drawn=12/072023, Distributor 1=Mouser, Drawn by=Varun, FIT/NFIT=NFIT, Manufacturer part no.="LS M676-Q2S1-1-Z", Price=₹36.70, Price (Quantity)=₹15.93(+100), Reference (datatsheet)=https://www.mouser.in/ProductDetail/ams-OSRAM/LS-M676-Q2S1-1-Z?qs=sGAEpiMZZMuCm2JlHBGefsr41A2gKzLGVzDa1YgO91o%3D, Supplier 1=Mouser, Supplier Part Number 1=720-LSM676-Q2S1-1-Z
Q1: library part BC557, "P-Channel 20 V 2.5A (Ta) 800mW (Ta) Surface Mount SOT-23-3", Distributor 1 part no.=BC557ATACT-ND, Manufacturer=onsemi, Supplier Part Number 1=BCW30LT1G, ComponentLink1Description="Reference Product Link", ComponentLink1URL=https://robu.in/product/bc557-pnp-transistor-pack-of-20/, Date drawn=12/09/24, Distributor 1=Digikey, Drawn by="Varun Chakravarthy", FIT/NFIT=FIT, Manufacturer part no.=BC557ATA, Price=₹24.31, Price (Quantity)=₹9.27890(100+), Reference(datasheet)=https://www.onsemi.com/pdf/datasheet/bc556bta-d.pdf, Supplier 1="Arrow Electronics", Supplier 2=Avnet, Supplier Part Number 2=BC557ATA
Q2: "Bipolar (BJT) Transistor NPN 30 V 100 mA 300MHz 500 mW Through Hole TO-92-3", Distributor 1 part no.=2156-BC548-FS-ND, Manufacturer="Fairchild Semiconductor", Supplier Part Number 1=637-BC548A, ComponentLink1Description="Reference Product Link", ComponentLink1URL=https://robu.in/product/bc557-pnp-transistor-pack-of-20/, Date drawn=12/09/24, Distributor 1=Digikey, Drawn by="Varun Chakravarthy", FIT/NFIT=FIT, Manufacturer part no.=BC548, Price=-, Price (Quantity)="₹4.19100 (bulk)", Reference(datasheet)=https://rocelec.widen.net/view/pdf/q1kc0zm1fe/FAIRS24942-1.pdf?t.download=true&u=5oefqw, Supplier 1=Mouser, Supplier 2=Mouser, Supplier 3="Arrow Electronics", Supplier Part Number 2=637-BC548BBK, Supplier Part Number 3=BC548CBK
Q3 Q4: "P-Channel 20 V 2.5A (Ta) 800mW (Ta) Surface Mount SOT-23-3", Distributor 1 part no.=DMG2301U-7DICT-ND, Manufacturer="Diodes Incorporated", Supplier Part Number 1=5623319, ComponentLink1Description="Reference Product Link", ComponentLink1URL=https://www.digikey.in/en/products/detail/murata-electronics/GRM21BR71A105KA01L/586695, Date drawn=05/09/24, Distributor 1=digikey, Drawn by="Varun Chakravarthy", FIT/NFIT=FIT, Manufacturer part no.=DMG2301U-7, Price=₹25.15, Price (Quantity)=₹9.06090(100+), Reference(datasheet)=https://mm.digikey.com/Volume0/opasdata/d220001/medias/docus/645/DMG2301U.pdf, Supplier 1="Future Electronics"
R1: "NTC Thermistor 10k Bead, Epoxy", Distributor 1 part no.=615-1054-ND, Distributor 2 part no.=EC-0554, Manufacturer="Panasonic Electronic Components", Package="NTC TH", ComponentLink1Description="Reference Product Link", ComponentLink1URL=https://www.digikey.in/en/products/detail/panasonic-electronic-components/ERJ-6GEYJ273V/83082?s=N4IgTCBcDaIKICUBSBaAbAcTgTSWA7AMwBqIAugL5A, ComponentLink2Description="Reference Product Link  2", ComponentLink2URL=https://www.electronicscomp.com/10k-ohm-ntc-thermistor?search=10k%20thermistor%20, Date drawn=1/9/2024, Distributor 1=Digikey, Distributor 2="Electronics Comp", Dranw by=Varun, FIT/NFIT=FIT, Manufacturer part no.=DC103G9G, Price _1(Quantity)="₹49.83940 (100+)", Price_1=₹90.53, Price_2=Rs.9.00, Reference(datasheet)=https://www.vishay.com/docs/29154/ntcle213e3.pdf, Supplier 1=Digikey, Supplier Part Number 1=615-1054-ND
R2: "383 Ohms ±0.1% 0.125W, 1/8W Chip Resistor 0805 (2012 Metric) Automotive AEC-Q200 Thin Film", Distributor 1 part no.=10-ERA-6AEB3830VCT-ND, Manufacturer="Panasonic Electronic Components", Package=0805, Supplier Part Number 1=1064269, ComponentLink1Description="Reference Product Link", ComponentLink1URL=https://www.digikey.in/en/products/detail/panasonic-electronic-components/ERA-6AEB3830V/2025625?s=N4IgTCBcDaIIwAYC0BRASgQSQNgygQgMwAchCAagMIAqSAcgCIgC6AvkA, Date drawn=1/9/2024, Distributor 1=Digikey, Dranw by=Varun, FIT/NFIT=FIT, Manufacturer part no.=ERA-6AEB3830V, Price=₹10.90, Price (Quantity)="₹5.89250 (100+)", Reference(datasheet)=https://industrial.panasonic.com/cdbs/www-data/pdf/RDM0000/AOA0000C307.pdf, Supplier 1="Future Electronics"
R3 R15: "27 kOhms ±5% 0.125W, 1/8W Chip Resistor 0805 (2012 Metric) Automotive AEC-Q200 Thick Film", Distributor 1 part no.=P27KACT-ND, Manufacturer="Panasonic Electronic Components", Package=0805, Supplier Part Number 1=4054913, ComponentLink1Description="Reference Product Link", ComponentLink1URL=https://www.digikey.in/en/products/detail/panasonic-electronic-components/ERJ-6GEYJ273V/83082?s=N4IgTCBcDaIKICUBSBaAbAcTgTSWA7AMwBqIAugL5A, Date drawn=1/9/2024, Distributor 1=Digikey, Dranw by=Varun, FIT/NFIT=FIT, Manufacturer part no.=ERJ-6GEYJ273V, Price=₹8.38, Price (Quantity)="₹1.76020 (100+)", Reference(datasheet)=https://industrial.panasonic.com/cdbs/www-data/pdf/RDA0000/AOA0000C301.pdf, Supplier 1="Future Electronics"
R4 R5 R27 R28: "100 Ohms ±5% 0.125W, 1/8W Chip Resistor 0805 (2012 Metric) Automotive AEC-Q200 Thick Film", Distributor 1 part no.=P100ACT-ND, Manufacturer="Panasonic Electronic Components", Package=0805, Supplier Part Number 1=9028505, ComponentLink1Description="Reference Product Link", ComponentLink1URL=https://www.digikey.in/en/products/detail/panasonic-electronic-components/ERJ-6GEYJ101V/89678, Date drawn=1/9/2024, Distributor 1=Digikey, Dranw by=Varun, FIT/NFIT=FIT, Manufacturer part no.=ERJ-6GEYJ101V, Price=₹8.38, Price (Quantity)=₹1.76020(100+), Reference(datasheet)=https://industrial.panasonic.com/cdbs/www-data/pdf/RDA0000/AOA0000C301.pdf, Supplier 1="Future Electronics"
R6: "1 kOhms ±5% 0.125W, 1/8W Chip Resistor 0805 (2012 Metric) Automotive AEC-Q200 Thick Film", Distributor 1 part no.=10-ERA-6AEB3830VCT-ND, Manufacturer="Panasonic Electronic Components", Manufacturer part no.=P1.0KACT-ND, Package=0805, Supplier Part Number 1=9031152, ComponentLink1Description="Reference Product Link", ComponentLink1URL=https://www.digikey.in/en/products/detail/panasonic-electronic-components/ERJ-6GEYJ102V/83014, Date drawn=1/9/2024, Distributor 1=Digikey, Dranw by=Varun, FIT/NFIT=FIT, Price=₹8.38, Price (Quantity)="₹1.76020 (100+)", Reference(datasheet)=https://industrial.panasonic.com/cdbs/www-data/pdf/RDA0000/AOA0000C301.pdf, Supplier 1="Future Electronics"
R7 R11: "560 Ohms ±0.1% 0.125W, 1/8W Chip Resistor 0805 (2012 Metric) Automotive AEC-Q200 Thin Film", Distributor 1 part no.=P560DACT-ND, Manufacturer="Panasonic Electronic Components", Package=0805, Supplier Part Number 1=6065350, ComponentLink1Description="Reference Product Link", ComponentLink1URL=https://www.digikey.in/en/products/detail/panasonic-electronic-components/ERA-6AEB561V/1465742, Date drawn=12/9/2024, Distributor 1=Digikey, Dranw by=Varun, FIT/NFIT=FIT, Manufacturer part no.=ERA-6AEB561V, Price=₹10.90, Price (Quantity)="₹5.89250 (100+)", Reference(datasheet)=https://industrial.panasonic.com/cdbs/www-data/pdf/RDM0000/AOA0000C307.pdf, Supplier 1="Future Electronics"
R8: "330 Ohms ±0.1% 0.125W, 1/8W Chip Resistor 0805 (2012 Metric) Automotive AEC-Q200 Thin Film", Distributor 1 part no.=P330DACT-ND, Manufacturer="Panasonic Electronic Components", Package=0805, Supplier Part Number 1=7176711, ComponentLink1Description="Reference Product Link", ComponentLink1URL=https://www.digikey.in/en/products/detail/panasonic-electronic-components/ERA-6AEB331V/1465736, Date drawn=12/9/2024, Distributor 1=Digikey, Dranw by=Varun, FIT/NFIT=FIT, Manufacturer part no.=ERA-6AEB331V, Price=₹10.90, Price (Quantity)="₹5.89250 (100+)", Reference(datasheet)=https://industrial.panasonic.com/cdbs/www-data/pdf/RDM0000/AOA0000C307.pdf, Supplier 1="Future Electronics"
R9: "100 Ohms ±0.1% 0.125W, 1/8W Chip Resistor 0805 (2012 Metric) Automotive AEC-Q200 Thin Film", Distributor 1 part no.=P100DACT-ND, Manufacturer="Panasonic Electronic Components", Package=0805, Supplier Part Number 1=667-ERA-6AEB101V, ComponentLink1Description="Reference Product Link", ComponentLink1URL=https://www.digikey.in/en/products/detail/panasonic-electronic-components/ERA-6AEB101V/1465724, Date drawn=12/9/2024, Distributor 1=Digikey, Dranw by=Varun, FIT/NFIT=NFIT, Manufacturer part no.=ERA-6AEB101V, Price=₹10.90, Price (Quantity)="₹5.89250 (100+)", Reference(datasheet)=https://industrial.panasonic.com/cdbs/www-data/pdf/RDM0000/AOA0000C307.pdf, Supplier 1=Mouser
R10: "510 Ohms ±0.1% 0.125W, 1/8W Chip Resistor 0805 (2012 Metric) Automotive AEC-Q200 Thin Film", Distributor 1 part no.=P510DACT-ND, Manufacturer="Panasonic Electronic Components", Package=0805, Supplier Part Number 1=667-ERA-6AEB511V, ComponentLink1Description="Reference Product Link", ComponentLink1URL=https://www.digikey.in/en/products/detail/panasonic-electronic-components/ERA-6AEB511V/1465741, Date drawn=12/9/2024, Distributor 1=Digikey, Dranw by=Varun, FIT/NFIT=FIT, Manufacturer part no.=ERA-6AEB511V, Price=₹10.90, Price (Quantity)="₹5.89250 (100+)", Reference(datasheet)=https://industrial.panasonic.com/cdbs/www-data/pdf/RDM0000/AOA0000C307.pdf, Supplier 1=Mouser
R12 R13 R16 R17 R18 R19 R20 R21 R22 R23 R24 R25 R26: "10 kOhms ±0.1% 0.125W, 1/8W Chip Resistor 0805 (2012 Metric) Automotive AEC-Q200 Thin Film", Distributor 1 part no.=P10KDACT-ND, Manufacturer="Panasonic Electronic Components", Package=0805, Supplier Part Number 1=5028531, ComponentLink1Description="Reference Product Link", ComponentLink1URL=https://www.digikey.in/en/products/detail/panasonic-electronic-components/ERA-6AEB103V/1465773, Date drawn=1/9/2024, Distributor 1=Digikey, Dranw by=Varun, FIT/NFIT=FIT, Manufacturer part no.=ERA-6AEB103V, Price=₹10.90, Price (Quantity)="₹5.89250 (100+)", Reference(datasheet)=https://industrial.panasonic.com/cdbs/www-data/pdf/RDM0000/AOA0000C307.pdf, Supplier 1="Future Electronics"
R14: "33 kOhms ±5% 5W Chip Resistor 5329 (13573 Metric), J-Lead Flame Retardant Coating, Safety Metal Film", Distributor 1 part no.=A106035CT-ND, Manufacturer="TE Connectivity Passive Product", Package=5329, ComponentLink1Description="Reference Product Link", ComponentLink1URL=https://www.digikey.in/en/products/detail/te-connectivity-passive-product/SMF533KJT/2367121, Date drawn=17/9/2024, Distributor 1=Digikey, Dranw by=Varun, FIT/NFIT=FIT, Manufacturer part no.=SMF533KJT, Price=₹92.20, Price (Quantity)="₹55.94150 (100+)", Reference(datasheet)=https://www.te.com/usa-en/product-4-1879234-4.datasheet.pdf, Supplier 1=Digikey, Supplier 2=Digikey, Supplier Part Number 1=A106035CT-ND, Supplier Part Number 2=A106035CT-ND
RL1 RL2: "5V Trigger Relay Module", Distributor 1 part no.=340142-SRD-05VDC-SL-C, Manufacturer=SongLe, Package=TH, ComponentLink1Description="Reference Product Link", ComponentLink1URL=https://www.digikey.in/en/products/detail/panasonic-electronic-components/ERA-6AEB561V/1465742, Date drawn=12/9/2024, Distributor 1=Winsource, Dranw by=Varun, FIT/NFIT=FIT, Manufacturer part no.=SRD-05VDC-SL-C, Price=$0.277, Price (Quantity)="$0.277 (100+)", Reference(datasheet)=https://www.snapeda.com/parts/SRD-05VDC-SL-C/Songle%20Relay/datasheet/
SW1: "Tactile Switch SPST-NO Top Actuated Through Hole", Distributor 1 part no.=450-1647-ND, Manufacturer="TE Connectivity ALCOSWITCH Switches", Package=TH, Supplier Part Number 1=3054607, ComponentLink1Description="Reference Product Link", ComponentLink1URL=https://www.digikey.in/en/products/detail/te-connectivity-alcoswitch-switches/1-1825910-8/1632533, Date drawn=12/9/2024, Distributor 1=Digikey, Dranw by=Varun, FIT/NFIT=FIT, Manufacturer part no.=1-1825910-8, Price=₹8.38, Price (Quantity)=₹6.53800(100+), Reference(datasheet)=https://www.te.com/usa-en/product-1-1825910-8.datasheet.pdf, Supplier 1="Future Electronics"
TP1 TP2 TP3 TP4 TP5 TP6 TP7 TP8 TP9 TP10 TP11 TP12 TP13 TP14: library part TP
U1: "AC to DC Power Supply Module", Distributor 1 part no.=EC-4693, Manufacturer=Hi-link, ComponentLink1Description="Reference Product Link", ComponentLink1URL=https://www.electronicscomp.com/power-supply/power-supply-module/hi-link-power-supply-module/hlk-10m05-hi-link-5v-10w-ac-to-dc-power-supply-module, Date drawn=31/8/24, Distributor 1=ElectroncisComp, Drawn by=Varun, FIT/NFIT=FIT, Manufacturer part no.=HLK-10M05, Price=₹199, Price (Quantity)=₹199(100+), Reference(datasheet)=https://www.lcsc.com/datasheet/lcsc_datasheet_2305061443_HI-LINK-HLK-10M05_C403745.pdf
U2: "800-MA LINEAR BATTERY CHARGER FO", Distributor 1 part no.=296-BQ25170DSGRCT-ND, Manufacturer="Texas Instruments", Supplier Part Number 1=595-BQ25170DSGR, ComponentLink1Description="Reference Product Link", ComponentLink1URL=https://www.digikey.in/en/products/detail/texas-instruments/BQ25170DSGR/14124032?s=N4IgjCBcoLQCxVAYygMwIYBsDOBTANCAPZQDaIAnGGAEwQC6Avs0A, Date drawn=31/8/24, Distributor 1=Digikey, Drawn by=Varun, FIT/NFIT=FIT, Manufacturing Part number=BQ25170DSGR, Price=₹84.66, Price (Quantity)=₹58.85000(100+), Reference(datasheet)=https://www.ti.com/lit/ds/symlink/bq25170.pdf?HQS=dis-dk-null-digikeymode-dsf-pf-null-wwe&ts=1725183618378, Supplier 1=Mouser
U3: "Linear Voltage Regulator IC Positive Fixed 1 Output 300mA SOT-23-5", Distributor 1 part no.=2129-RP170N331D-TR-FECT-ND, Manufacturer="Nisshinbo Micro Devices Inc.", ComponentLink1Description="Reference Product Link", ComponentLink1URL=https://www.digikey.in/en/products/detail/nisshinbo-micro-devices-inc/RP170N331D-TR-FE/10216995, Date drawn=31/8/24, Distributor 1=Digikey, Drawn by=Varun, FIT/NFIT=FIT, Price=₹48.62, Price (Quantity)=₹30.81220(100+), Reference(datasheet)=https://www.nisshinbo-microdevices.co.jp/en/pdf/datasheet/rp170-ea.pdf, Supplier 1=Digikey, Supplier Part Number 1=2129-RP170N331D-TR-FECT-ND
U4: "Counter IC Counter, Decade 1 Element 10 Bit Positive, Negative 16-PDIP", Distributor 1 part no.=296-2037-5-ND, Distributor 2 part no.="CD4017 - Decade Counter IC", Manufacturer="Texas Instruments", Supplier Part Number 1=595-CD4017BE, Value 2=TH, ComponentLink1Description="Reference Product link", ComponentLink1URL=https://www.digikey.in/en/products/detail/kyocera-avx/08056D104KAT2A/11568656, ComponentLink2Description="Reference Product link2", ComponentLink2URL=https://robocraze.com/products/decade-counter-ic-cd4017, Date drawn=08/09/24, Distributor 1=digikey, Distributor 2=Robocraze, Drawn by="Varun Chakravarthy", FIT/NFIT=FIT, Manufacturer part no.=CD4017BE, Price=₹87.17, Price (Quantity)="₹60.75270 (100+)", Reference(datasheet)=https://www.ti.com/lit/ds/symlink/cd4017b.pdf?HQS=dis-dk-null-digikeymode-dsf-pf-null-wwe&ts=1725798122865&ref_url=https%253A%252F%252Fwww.ti.com%252Fgeneral%252Fdocs%252Fsuppproductinfo.tsp%253FdistId%253D10%2526gotoUrl%253Dhttps%253A%252F%252Fwww.ti.com%252Flit%252Fgpn%252Fcd4017b, Supplier 1=Mouser
U5: "Current Sensor 20A 1 Channel Hall Effect, Open Loop Bidirectional 8-SOIC (0.154\", 3.90mm Width)", Distributor 1 part no.=620-1190-1-ND, Manufacturer=onsemi, Supplier Part Number 1=BCW30LT1G, ComponentLink1Description="Reference Product Link", ComponentLink1URL=https://robu.in/product/acs712-30a-range-current-sensor-module-hall-sensor/, Date drawn=16/09/24, Distributor 1=Digikey, Drawn by="Varun Chakravarthy", FIT/NFIT=FIT, Manufacturer part no.=ACS712ELCTR-20A-T, Price=₹317.68, Price (Quantity)=₹194.98210(100+), Reference(datasheet)=https://www.allegromicro.com/~/media/Files/Datasheets/ACS712-Datasheet.ashx, Supplier 1="Arrow Electronics", Supplier 2=Avnet, Supplier Part Number 2=BC557ATA
U6: "Optoisolator Transistor with Base Output 5000Vrms 1 Channel 6-DIP", Distributor 1 part no.=58-H11AA1-ND, Manufacturer="Isocom Components 2004 LTD", Supplier Part Number 1=5411806, Supplier Part Number 10=782-H11AA1-X006, ComponentLink1Description="Reference Product Link", ComponentLink1URL=https://www.digikey.in/en/products/detail/isocom-components-2004-ltd/H11AA1/21185110, Date drawn=16/09/24, Distributor 1=digikey, Drawn by="Varun Chakravarthy", FIT/NFIT=FIT, Manufacturer part no.=H11AA1, Price=₹29.49416, Price (Quantity)=₹29.49416(100+), Reference(datasheet)=https://www.vishay.com/docs/83608/83608.pdf, Supplier 1="Future Electronics", Supplier 2=Mouser, Supplier 3="Future Electronics", Supplier 4="Future Electronics", Supplier 5=Mouser, Supplier 6=Digikey, Supplier 7=Mouser, Supplier 8=Digikey, Supplier 9="Future Electronics", Supplier 10=Mouser, Supplier Part Number 2=782-H11AA1, Supplier Part Number 3=9187492, Supplier Part Number 4=8266744, Supplier Part Number 5=512-H11AA1SR2VM, Supplier Part Number 6=H11AA1TVM-ND, Supplier Part Number 7=782-H11AA1-X007T, Supplier Part Number 8=H11AA1SM-ND, Supplier Part Number 9=2034656
U7: "Bluetooth, WiFi 802.11b/g/n, Bluetooth v4.2 +EDR, Class 1, 2 and 3 Transceiver Module 2.4GHz ~ 2.5GHz Integrated, Trace Surface Mount", Distributor 1 part no.=1965-ESP32-WROOM-32E-N4CT-ND, Manufacturer="Espressif Systems", Package=SMD, Value1="260mA (Max current)", Value2=3.3V, ComponentLink1Description="Reference Product Link", ComponentLink1URL=https://www.digikey.in/en/products/detail/espressif-systems/ESP32-WROOM-32E-N4/11613125, Date drawn=2/9/2024, Distributor 1=Digikey, Drawn by=Varun, FIT/NFIT=FIT, Manufacturer part no.=ESP32-WROOM-32E-N4, Price=₹209.55, Price (Quantity)=₹209.55(+100), Reference (datatsheet)=https://www.espressif.com/sites/default/files/documentation/esp32-wroom-32e_esp32-wroom-32ue_datasheet_en.pdf, Supplier 1=Digikey, Supplier Part Number 1=1965-ESP32-WROOM-32E-N4CT-ND
U8: "miniature cellular GSM modem", Manufacturer=SIMCOM, Manufacturer part no.=-, ComponentLink1Description="Reference Product Link", ComponentLink1URL=https://www.alibaba.com/product-detail/Smallest-GSM-GPRS-Module-Quad-Band_60819714360.html?spm=a2700.7724857.0.0.28ae22d6Oz3Vcz, Date drawn=3/9/2024, Distributor 1=Alibaba, Dranw by=Varun, FIT/NFIT=FIT, Price=₹100, Price (Quantity)="₹100 (100+)", Reference(datasheet)=https://cdn-shop.adafruit.com/datasheets/sim800_series_at_command_manual_v1.01.pdf
U9 U10: "Optoisolator Transistor Output 5000Vrms 1 Channel 4-SMD", Distributor 1 part no.=1855-1014-1-ND, Manufacturer="SHARP/Socle Technology", Supplier Part Number 1=852-PC81710NIP1B, ComponentLink1Description="Product link", ComponentLink1URL=https://www.digikey.in/en/products/detail/sharp-socle-technology/PC81710NIP1B/7798258, Date drawn=05/07/24, Distributor 1=Digikey, Dranw by=Varun, FIT/NFIT=FIT, Manufacturer part no.=PC81710NIP1B, Price=₹83.82, Price (Quantity)=₹39.43730(100+), Reference(datasheet)=http://www.socle-tech.com/doc/IC%20Channel%20Product/Optoelectronic%20Components/Photocoupler/PC8171_NIP1B_ED-16P023.pdf, Supplier 1=Mouser

## Free pads (board coordinates)
  round 1.524 hole 0.762: 2(36.83,11.938) 2(36.957,34.417) 2(40.685,11.904) 2(40.73,34.47) 3(38.735,11.938) 3(38.862,34.417) 3(42.59,11.904) 3(42.635,34.47) 4(44.495,11.904) 4(44.54,34.47)

## Via types
v1: diameter 0.6, hole 0.3, Top Layer to Bottom Layer, 140 vias
v2: diameter 0.6, hole 0.3, Top Layer to Bottom Layer, tented top, 7 vias
v3: diameter 0.6, hole 0.3, Top Layer to Bottom Layer, tented both sides, 1 vias

## Nets (pads, with @x,y where several pads share a name; then routed paths per layer and width w, separated by ;. In a path a pad name is that pad's centre, name@x,y a point inside that pad or via, vN(x,y) a via of type N, cw(c..) or ccw(c..) an arc to the next point about the centre after c; other vN are vias at no path point)
3V3VDC: C4.1 C10.1 C11.1 J7.1 Q2.1 R15.2 R16.2 R17.2 R19.2 R20.2 R22.2 R27.2 R28.2 U3.5 U7.2 | length 25
  Top Layer w0.5: Q2.1@46.923,43.561 48.133,43.561 48.48,43.908 R27.2@48.48,46.736 ; R20.2@47.656,60.494 v1(49.307,60.494) R17.2@50.958,60.494 ; v1(49.303,55.495) R16.2@50.954,55.495 ; v1(58.608,64.45) C10.1@58.608,66.421 58.608,68.915 58.631,68.938 U7.2@62.09,68.938 ; R28.2@71.624,48.476 71.674,48.526 v1(71.674,50.546) ; v1(85.852,63.627) R22.2@87.723,63.627 ; R15.2@89.857,56.134 v1(91.728,56.134) ; v1(93.946,50.292) R19.2@95.69,50.292
  other v1: 45.212,53.975 45.974,53.975 45.212,55.118 45.974,55.118 45.212,56.261 45.974,56.261
5V: C1.1 C7.1 pad.2@36.957,34.417 pad.2@40.73,34.47 pad.3@38.862,34.417 pad.3@42.635,34.47 pad.4@44.54,34.47 Q3.2 R24.2 TP1. U1.4 U2.1 U5.8 | length 11.9
  Top Layer w0.5: v1(52.578,40.513) R24.2@52.578,42.384 ; Q3.2@70.551,44.815 v1(70.551,46.675) ; v1(104.328,40.325) C7.1@104.328,42.672 104.328,44.954 U5.8@104.332,44.958
  Top Layer w1: TP1.@20.961,33.421 20.961,36.916 C1.1@20.979,36.916
BAT_STAT: LED1.2 U2.5 | length 4.4
  Top Layer w0.2: U2.5@25.426,38.816 26.435,38.816 27.639,37.612 LED1.2@27.639,35.961
BOOT_0: J6.1 R19.1 U7.25 | length 22.7
  Top Layer w0.5: U7.25@79.591,53.698 79.602,53.71 82.158,53.71 v1(82.169,53.721) ; R19.1@97.79,50.292 J6.1@97.79,53.34
  Bottom Layer w0.5: v1(82.169,53.721) 84.074,51.816 96.266,51.816 J6.1@97.79,53.34